# Altium PCB PCB1.1.PcbDoc (part 2 of 2)
Units mm, origin at the board's own origin, x right, y up, seen from the top; angles counter-clockwise.
Board outline 43 x 43 mm, 4 copper layers (Top Layer, Mid-Layer 1, Mid-Layer 2, Bottom Layer); 149 components, 104 nets, 520 pads, 244 vias.
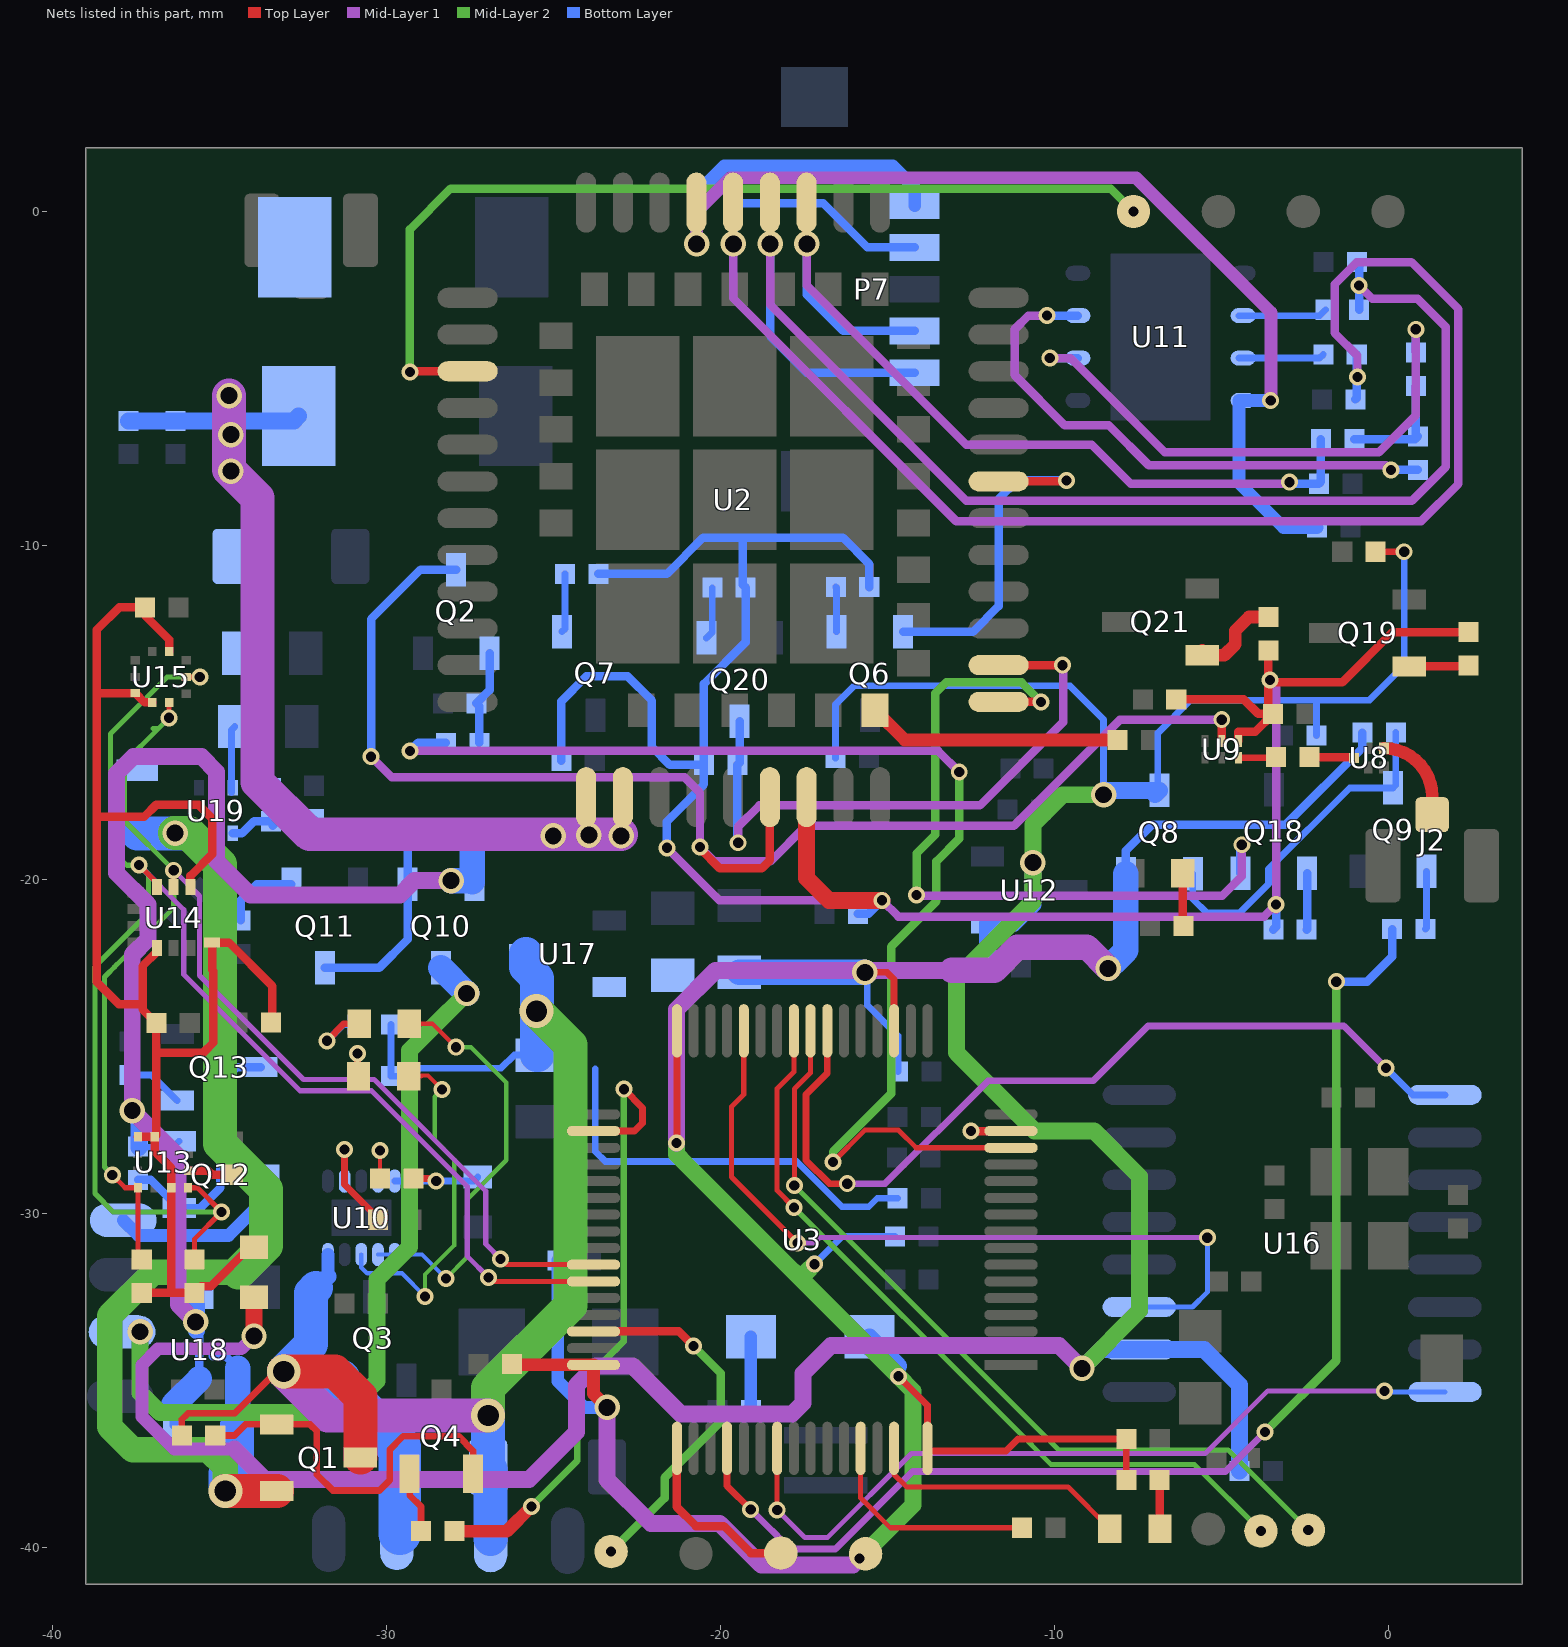
[diagram p4: the nets of this part, all layers, seen from the top]

## Via types
v1: diameter 0.508, hole 0.305, Top Layer to Bottom Layer, tented both sides, 214 vias
v2: diameter 0.762, hole 0.508, Top Layer to Bottom Layer, tented both sides, 23 vias
v3: diameter 1.016, hole 0.635, Top Layer to Bottom Layer, tented both sides, 7 vias

## Nets (pads, with @x,y where several pads share a name; then routed paths per layer and width w, separated by ;. In a path a pad name is that pad's centre, name@x,y a point inside that pad or via, vN(x,y) a via of type N, cw(c..) or ccw(c..) an arc to the next point about the centre after c; other vN are vias at no path point) (continued)
NetC40_1: C40.1 U13.5 | length 1.4
  Top Layer w0.254: U13.5@-35.914,-28.714 -35.325,-28.714 -35.201,-28.838 C40.1@-34.578,-28.838
NetD1_2: D1.2 R7.1 | length 2.2
  Bottom Layer w0.381: R7.1@-19.077,-35.878 D1.2@-19.077,-33.693
NetJ2_1: J2.1 U8.4 | length 2.8
  Top Layer w0.381: U8.4@-0.116,-16.07 cw(c-0.116,-17.507) 1.321,-17.507 J2.1@1.321,-18.058
NetL1_1: L1.1 U9.3 | length 1.1
  Top Layer w0.203: U9.3@-4.478,-16.354 -3.374,-16.354 L1.1@-3.353,-16.332
NetL1_2: L1.2 U8.1 | length 1.3
  Top Layer w0.254: L1.2@-2.353,-16.332 -1.041,-16.332 U8.1@-1.016,-16.358
NetL5_2: L5.2 U18.B1 | length 2.4
  Bottom Layer w0.254: L5.2@-36.357,-36.336 L5.2@-36.357,-35.721 ; -35.587,-34.952 U18.B1@-35.587,-34.277
  Bottom Layer w0.762: L5.2@-36.357,-35.721 -35.587,-34.952
NetL6_1: L6.1 U19.5
NetLED1_2: LED1.2 R9.1 | length 1.6
  Top Layer w0.254: LED1.2@-6.145,-19.812 -6.145,-21.363 R9.1@-6.121,-21.387
NetLED2_1: LED2.1 R29.2 | length 2.3
  Top Layer w0.203: v1(-31.767,-24.827) -31.256,-24.316 LED2.1@-30.802,-24.316
  Bottom Layer w0.203: v1(-31.767,-24.827) -31.277,-24.336 R29.2@-30.85,-24.336
NetLED2_2: LED2.2 U10.6 U10.7 | length 13
  Top Layer w0.127: LED2.2@-29.302,-24.316 -28.61,-24.316 ; -28.332,-24.594 -28.61,-24.316 ; v1(-27.907,-25.019) -28.61,-24.316
  Mid-Layer 2 w0.127: v1(-28.209,-31.94) -27.569,-31.3 -27.569,-29.574 -26.401,-28.406 -26.401,-27.534 -26.401,-27.356 -26.401,-26.073 -27.454,-25.019 v1(-27.907,-25.019)
  Bottom Layer w0.127: U10.7@-30.239,-31.228 U10.6@-29.739,-31.228 -28.921,-31.228 v1(-28.209,-31.94)
NetLED4_1: LED4.1 R12.2 | length 1.4
  Top Layer w0.203: v1(-30.85,-25.204) -30.85,-25.861 LED4.1@-30.825,-25.886
  Bottom Layer w0.203: R12.2@-30.85,-25.886 v1(-30.85,-25.204)
NetLED4_2: LED4.2 U10.8 | length 11.1
  Top Layer w0.127: -28.946,-25.886 LED4.2@-29.325,-25.886 -29.307,-25.868 -28.741,-25.868 v1(-28.322,-26.287)
  Mid-Layer 2 w0.127: v1(-28.833,-32.48) -28.833,-31.828 -27.96,-30.955 -27.96,-28.38 -28.54,-27.8 -28.54,-26.505 v1(-28.322,-26.287)
  Bottom Layer w0.127: U10.8@-30.739,-31.228 -30.739,-31.614 -30.565,-31.789 -29.524,-31.789 v1(-28.833,-32.48)
NetLED5_1: LED5.1 R65.1 | length 1.5
  Top Layer w0.254: R65.1@-6.837,-37.975 -6.828,-37.983 LED5.1@-6.828,-39.433
NetLED5_2: LED5.2 U3.62 | length 7.9
  Top Layer w0.152: U3.62@-14.788,-37.03 -14.788,-37.81 -14.416,-38.183 -9.954,-38.183 -9.579,-38.183 LED5.2@-8.328,-39.433
NetQ1_1: Q1.1 Q4.2 R4.2 | length 11.5
  Top Layer w0.203: R4.2@-35.113,-36.64 -34.538,-36.64 -34.208,-36.31 Q1.1@-33.268,-36.31 -32.277,-36.31 -32.074,-36.513 -32.074,-37.809 -31.592,-38.291 -30.195,-38.291 -29.89,-37.986 -29.89,-37.072 -29.483,-36.666 -27.832,-36.666 -27.39,-37.108 Q4.2@-27.39,-37.791
NetQ2_1: Q2.1 R10.1 R11.1 | length 2.9
  Bottom Layer w0.254: R10.1@-27.207,-15.906 -27.207,-14.808 R11.1@-27.292,-14.723 -26.899,-14.33 Q2.1@-26.899,-13.221
NetQ4_1: Q4.1 R8.1 | length 1.9
  Top Layer w0.203: Q4.1@-29.29,-37.791 -29.29,-38.433 -28.95,-38.774 R8.1@-28.95,-39.51
NetQ6_1: Q6.1 R28.1 | length 1.3
  Bottom Layer w0.203: R28.1@-16.532,-11.242 -16.515,-11.259 Q6.1@-16.515,-12.583
NetQ7_1: Q7.1 R31.1 | length 1.8
  Bottom Layer w0.203: Q7.1@-24.73,-12.577 -24.645,-12.492 R31.1@-24.645,-10.847
NetQ8_1: Q8.1 Q9.3 R33.2 | length 10.3
  Bottom Layer w0.203: Q8.1@-5.846,-19.831 -5.846,-20.58 -5.426,-21 -4.446,-21 -3.579,-20.133 -3.579,-19.688 -1.146,-17.256 Q9.3@0.152,-17.256 ; Q9.3@0.234,-17.174 R33.2@0.234,-15.598
NetQ9_1: Q9.1 R34.1 | length 1.7
  Bottom Layer w0.203: R34.1@1.12,-21.483 1.152,-21.451 Q9.1@1.152,-19.756
NetQ10_1: Q10.1 Q11.3 R36.2 | length 6.7
  Bottom Layer w0.254: Q11.3@-31.833,-22.64 -30.204,-22.64 -29.356,-21.792 Q10.1@-29.356,-20.14 -29.356,-19.115 -28.817,-18.576 R36.2@-28.425,-18.576
NetQ11_1: Q11.1 R37.1 | length 2.4
  Bottom Layer w0.254: R37.1@-34.352,-21.225 -34.352,-20.625 -33.868,-20.14 Q11.1@-32.909,-20.14 ; Q11.1@-32.909,-20.14 -32.871,-20.179 Q11.1@-32.833,-20.14 Q11.1@-32.909,-20.14
NetQ12_1: Q12.1 Q13.3 R50.2 | length 7.6
  Bottom Layer w0.254: R50.2@-37.421,-28.99 -37.039,-28.99 Q12.1@-36.195,-29.834 -35.563,-29.834 -34.956,-29.228 -34.956,-26.095 -34.478,-25.618 Q13.3@-33.753,-25.618
NetQ13_1: Q13.1 R51.1 | length 1.7
  Bottom Layer w0.203: R51.1@-37.672,-25.848 -37.023,-25.848 Q13.1@-36.253,-26.618
NetQ18_1: Q18.1 R40.1 | length 1.7
  Bottom Layer w0.254: R40.1@-2.436,-21.5 -2.42,-21.484 Q18.1@-2.42,-19.807
NetQ19_1: Q19.1 R41.1 | length 1.8
  Top Layer w0.254: Q19.1@0.635,-13.614 2.388,-13.614 R41.1@2.413,-13.589
NetQ20_1: Q20.1 R44.1 | length 1.6
  Bottom Layer w0.203: Q20.1@-20.411,-12.766 -20.232,-12.587 R44.1@-20.232,-11.261
NetQ21_1: Q21.1 R45.1 | length 2.8
  Top Layer w0.381: Q21.1@-5.563,-13.132 Q21.1@-5.563,-13.284 -4.902,-13.284 -4.572,-12.954 -4.572,-12.649 -4.572,-12.548 -4.166,-12.141 R45.1@-3.581,-12.141
NetR3_1: R3.1 U3.60 | length 6.7
  Top Layer w0.152: U3.60@-15.788,-37.03 -15.788,-38.518 -14.901,-39.406 R3.1@-10.962,-39.406
NetR13_1: R13.1 U10.2 | length 3.5
  Top Layer w0.203: v1(-31.239,-28.081) -31.239,-29.128 -30.241,-30.126 R13.1@-30.241,-30.185
  Bottom Layer w0.203: U10.2@-31.239,-29.028 v1(-31.239,-28.081)
NetR14_1: R14.1 R15.2 U10.5 | length 3.3
  Top Layer w0.203: R14.1@-29.184,-28.953 -28.572,-28.953 v1(-28.498,-29.028)
  Bottom Layer w0.203: U10.5@-29.739,-29.028 v1(-28.498,-29.028) -27.376,-29.028 R15.2@-27.252,-28.903
NetR14_2: R14.2 U10.4 | length 1.8
  Top Layer w0.127: R14.2@-30.184,-28.953 v1(-30.184,-28.115)
  Bottom Layer w0.127: U10.4@-30.239,-29.028 -30.184,-28.972 v1(-30.184,-28.115)
NetR19_2: R19.2 R20.2 U19.1 | length 2.7
  Bottom Layer w0.254: U19.1@-34.588,-18.615 -34.312,-18.615 -33.951,-18.254 R19.2@-33.449,-18.254 -33.386,-18.191 R20.2@-32.16,-18.191 ; R19.2@-33.395,-18.391 R19.2@-33.325,-18.321
NetR23_2: R23.2 U11.7 | length 2.6
  Bottom Layer w0.203: U11.7@-4.464,-4.387 U11.7@-4.337,-4.387 ; U11.7@-4.337,-4.387 -3.48,-4.387 ; -3.48,-4.387 -2.05,-4.387 R23.2@-1.937,-4.274
NetR25_1: R25.1 U11.3 | length 16.7
  Mid-Layer 1 w0.254: v1(-10.215,-3.117) -10.77,-3.117 -11.176,-3.523 -11.176,-4.902 -9.677,-6.401 -8.357,-6.401 -7.163,-7.595 -0.055,-7.595 v1(0.084,-7.734) ; v1@0.061,-7.757 v1@0.076,-7.772
  Bottom Layer w0.254: v1(-10.215,-3.117) U11.3@-9.287,-3.117 ; v1(0.084,-7.734) R25.1@0.891,-7.734
NetR25_2: R25.2 R26.2 R27.2 | length 3.5
  Bottom Layer w0.254: R27.2@-1.01,-6.818 0.807,-6.818 R25.2@0.891,-6.734 0.83,-6.674 R26.2@0.83,-5.219
NetR26_1: R26.1 U11.2 | length 16.7
  Mid-Layer 1 w0.254: v1(-10.128,-4.387) -9.507,-4.387 -6.68,-7.214 -0.279,-7.214 0.83,-6.104 v1(0.83,-3.526)
  Bottom Layer w0.254: v1(-10.128,-4.387) U11.2@-9.287,-4.387 ; R26.1@0.83,-4.219 v1(0.83,-3.526)
NetR39_2: R39.2 U11.6 | length 2.7
  Bottom Layer w0.203: U11.6@-4.464,-3.117 U11.6@-4.337,-3.117 ; U11.6@-4.337,-3.117 -3.15,-3.117 ; -3.15,-3.117 -2.044,-3.117 R39.2@-1.868,-2.941
POWER_CTRL_GPS: R34.2 U3.52 | length 37.1
  Top Layer w0.203: U3.52@-19.788,-37.03 -19.788,-38.15 v1(-19.081,-38.858)
  Mid-Layer 1 w0.203: v1(-19.081,-38.858) -18.114,-39.825 ; -18.432,-39.507 -18.114,-39.825 ; v1(-3.686,-36.543) -4.865,-37.722 -14.231,-37.722 -16.549,-40.039 -17.899,-40.039 -18.114,-39.825
  Mid-Layer 2 w0.254: v1(-3.686,-36.543) -1.549,-34.406 v1(-1.549,-23.057)
  Bottom Layer w0.254: v1(-1.549,-23.057) -0.627,-23.057 0.12,-22.31 R34.2@0.12,-21.483
POWER_VBAT: R8.2 U3.34 | length 19.1
  Top Layer w0.203: U3.34@-23.788,-27.53 -22.558,-27.53 -22.321,-27.293 -22.321,-26.836 v1(-22.879,-26.277)
  Top Layer w0.381: R8.2@-27.95,-39.51 -26.385,-39.51 v1(-25.648,-38.774)
  Mid-Layer 2 w0.203: v1(-25.648,-38.774) -24.276,-37.402 -24.276,-35.218 -22.879,-33.821 -22.879,-27.826 v1(-22.879,-26.277)
PWRKEY: Q2.3 U2.39 U9.5 | length 41.8
  Top Layer w0.254: v1(-20.599,-19.025) -20.599,-19.075 -20.015,-19.66 -18.745,-19.66 -18.509,-19.423 U2.39@-18.509,-17.531 ; U9.5@-4.978,-15.854 v1(-4.978,-15.215)
  Mid-Layer 1 w0.254: v1(-30.445,-16.321) -29.824,-16.942 -21.057,-16.942 -20.599,-17.399 v1(-20.599,-19.025) -20.168,-19.456 -18.491,-19.456 -17.424,-18.39 -11.201,-18.39 -8.026,-15.215 v1(-4.978,-15.215)
  Bottom Layer w0.254: v1(-30.445,-16.321) -30.445,-12.2 -28.966,-10.721 Q2.3@-27.899,-10.721
RF_IN: C20.1 U2.68 | length 7.6
  Top Layer w0.381: U2.68@-15.359,-14.931 -14.466,-15.824 C20.1@-8.103,-15.824
RI: Q6.2 U2.7 | length 10.7
  Top Layer w0.254: U2.7@-11.659,-8.081 -9.656,-8.081 v1(-9.627,-8.052)
  Bottom Layer w0.254: Q6.2@-14.515,-12.583 -12.431,-12.583 -11.659,-11.811 -11.659,-8.611 -11.1,-8.052 v1(-9.627,-8.052)
RXD3: T18.1 U3.25 | length 23.7
  Top Layer w0.152: U3.25@-17.788,-24.53 -17.788,-25.754 -18.295,-26.261 -18.295,-29.305 v1(-17.782,-29.818)
  Mid-Layer 2 w0.152: v1(-17.782,-29.818) -11.207,-36.394 -10.083,-37.517 -5.793,-37.517 v1(-3.806,-39.504)
SCL: R22.2 U3.42 U13.1 U14.13 U15.2 | length 39.9
  Top Layer w0.152: v1(-38.194,-28.842) -37.81,-29.226 U13.1@-37.427,-29.226 -37.427,-31.263 R22.2@-37.313,-31.377 ; v1(-36.494,-15.156) U15.2@-36.494,-14.696 ; U14.13@-36.356,-20.228 v1(-36.356,-19.724) ; v1(-26.569,-31.357) -26.395,-31.53 U3.42@-23.788,-31.53
  Mid-Layer 1 w0.152: v1(-36.356,-19.724) -35.588,-20.492 -35.588,-22.875 -32.473,-25.99 -30.355,-25.99 -27.014,-29.331 -27.014,-30.912 v1(-26.569,-31.357)
  Mid-Layer 2 w0.152: v1(-38.194,-28.842) -38.429,-28.607 -38.429,-22.915 -38.065,-22.55 ; -38.147,-22.633 -38.065,-22.55 ; -36.972,-15.483 -36.821,-15.483 ; v1(-36.494,-15.156) -36.821,-15.483 ; -38.065,-22.55 -36.356,-20.842 v1(-36.356,-19.724) -37.831,-18.249 -37.831,-16.493 -36.821,-15.483
SCLK: U3.55 U16.16 | length 24
  Top Layer w0.152: v1(-18.288,-38.873) U3.55@-18.288,-37.03
  Mid-Layer 1 w0.152: v1(-18.288,-38.873) -17.459,-39.703 -16.786,-39.703 -14.267,-37.183 -5.474,-37.183 -3.599,-35.308 v1(-0.102,-35.308)
  Bottom Layer w0.152: v1(-0.102,-35.308) -0.073,-35.337 U16.16@1.702,-35.337
SDA: R24.1 U3.43 U13.4 U14.14 U15.4 | length 48
  Top Layer w0.152: v1(-37.399,-19.561) -36.856,-20.103 U14.14@-36.856,-20.228 ; U15.4@-35.982,-13.934 v1(-35.576,-13.934) ; U13.4@-35.927,-29.226 -35.647,-29.226 v1(-34.923,-29.95) -35.738,-30.765 R24.1@-35.738,-31.377 ; v1(-26.928,-31.915) -26.813,-32.03 U3.43@-23.788,-32.03
  Mid-Layer 1 w0.152: v1(-37.399,-19.561) -36.056,-20.904 -36.056,-22.839 -32.573,-26.323 -30.432,-26.323 -27.568,-29.187 -27.568,-31.275 v1(-26.928,-31.915)
  Mid-Layer 2 w0.152: v1@-37.399,-19.573 -37.76,-19.573 -38.255,-19.078 -38.255,-15.639 -36.549,-13.934 v1(-35.576,-13.934) ; v1(-37.399,-19.561) -37.112,-19.848 -37.112,-21.002 -38.716,-22.606 -38.716,-29.401 -38.166,-29.95 v1(-34.923,-29.95)
SIM_CLK: C17.2 P7.1 R39.1 U2.16 | length 41.2
  Mid-Layer 1 w0.254: v2(-18.499,-0.965) -18.499,-2.786 -12.624,-8.661 0.711,-8.661 1.727,-7.645 1.727,-3.454 0.889,-2.616 -0.47,-2.616 v1(-0.868,-2.218)
  Bottom Layer w0.254: v2(-18.499,-0.965) -18.499,-3.726 -17.399,-4.826 P7.1@-14.173,-4.826 ; C17.2@-0.932,-1.513 -0.868,-1.577 v1(-0.868,-2.218) R39.1@-0.868,-2.941
SIM_DATA: C18.2 P7.2 R27.1 U2.15 | length 26.9
  Top Layer w0.254: U2.15@-17.409,0.269 -17.409,-0.956 v2(-17.399,-0.965)
  Mid-Layer 1 w0.254: v2(-17.399,-0.965) -17.399,-2.21 -12.624,-6.985 -8.865,-6.985 -7.696,-8.153 -2.997,-8.153 v1(-2.946,-8.103)
  Bottom Layer w0.254: v2(-17.399,-0.965) -17.399,-2.489 -16.312,-3.576 P7.2@-14.173,-3.576 ; v1(-2.946,-8.103) -2.9,-8.149 C18.2@-2.067,-8.149 -2.01,-8.092 R27.1@-2.01,-6.818
SIM_PWR: R10.2 U3.14 | length 37.1
  Top Layer w0.152: v1(-16.616,-28.455) -15.664,-27.503 -14.655,-27.503 -14.128,-28.03 U3.14@-11.349,-28.03 ; U3.14@-11.349,-28.091 U3.14@-11.288,-28.03
  Mid-Layer 1 w0.254: v1(-29.278,-16.148) -13.47,-16.148 v1(-12.838,-16.78)
  Mid-Layer 2 w0.254: v1(-16.616,-28.455) -16.616,-28.149 -14.874,-26.408 -14.874,-22.006 -13.519,-20.651 -13.519,-19.457 -12.838,-18.776 v1(-12.838,-16.78)
  Bottom Layer w0.254: v1(-29.278,-16.148) -29.036,-15.906 R10.2@-28.207,-15.906
SIM_RST: C16.2 P7.4 R23.1 U2.17 | length 47.8
  Mid-Layer 1 w0.254: v2(-19.599,-0.965) -19.599,-2.601 -12.929,-9.271 0.991,-9.271 2.108,-8.153 2.108,-2.921 0.7,-1.513 -0.932,-1.513 -1.6,-2.181 -1.6,-3.632 -0.914,-4.318 v1(-0.914,-4.953)
  Bottom Layer w0.254: v2(-19.599,-0.965) -19.599,0.01 -19.355,0.254 -16.916,0.254 -15.586,-1.076 P7.4@-14.173,-1.076 ; C16.2@-0.975,-5.625 -0.937,-5.587 R23.1@-0.937,-4.274
SIM_RST1: U3.15 | length 1.2
  Top Layer w0.254: v1(-12.487,-27.53) U3.15@-11.288,-27.53
SIM_RXD: Q20.3 R46.1 U2.2 | length 19.4
  Top Layer w0.254: U2.2@-11.659,-13.581 v1(-9.746,-13.581) v1@-9.728,-13.564
  Mid-Layer 1 w0.254: v1(-19.456,-18.898) -19.456,-18.415 -18.821,-17.78 -12.217,-17.78 -9.728,-15.291 ; -9.728,-14.732 -9.728,-15.291 ; v1@-9.728,-13.564 -9.728,-15.291
  Bottom Layer w0.254: v1(-19.456,-18.898) -19.481,-18.873 R46.1@-19.481,-16.57 -19.411,-16.5 Q20.3@-19.411,-15.266
SIM_TXD: Q18.2 U2.1 | length 22.8
  Top Layer w0.254: U2.1@-11.659,-14.681 v1(-10.389,-14.681)
  Mid-Layer 1 w0.254: v1(-14.116,-20.46) -14.089,-20.488 -11.754,-20.488 -4.968,-20.488 -4.378,-19.897 v1(-4.378,-18.958)
  Mid-Layer 2 w0.254: v1(-14.116,-20.46) -14.116,-19.216 -13.562,-18.661 -13.562,-14.425 -13.233,-14.097 -10.973,-14.097 v1(-10.389,-14.681)
  Bottom Layer w0.254: Q18.2@-4.42,-19.807 v1@-4.42,-19
SIM_VDD: C14.2 P7.5 U2.18 U11.8 | length 38.4
  Mid-Layer 1 w0.381: v2(-20.699,-0.965) -20.699,0.002 -19.688,1.013 -7.541,1.013 -3.505,-3.023 v1@-3.505,-5.657
  Bottom Layer w0.381: v2(-20.699,-0.965) -20.699,0.535 -19.863,1.372 -14.834,1.372 -14.173,0.711 P7.5@-14.173,0.174 ; v1(-3.512,-5.657) -4.464,-5.657 -4.464,-8.126 -3.129,-9.461 C14.2@-2.128,-9.461
SPI_RESET: U3.28 U16.3 | length 23.5
  Top Layer w0.152: U3.28@-19.288,-24.53 -19.288,-26.435 -19.655,-26.802 -19.655,-28.902 v1(-17.678,-30.88)
  Mid-Layer 1 w0.152: v1(-17.678,-30.88) -17.173,-30.88 -17.016,-30.723 v1(-5.41,-30.723)
  Bottom Layer w0.152: U16.3@-7.448,-32.797 -5.854,-32.797 -5.41,-32.353 v1(-5.41,-30.723)
SWCLK: T10.1 U3.49 | length 5.4
  Top Layer w0.254: U3.49@-21.288,-37.03 -21.301,-37.043 -21.301,-38.777 -20.72,-39.358 -19.882,-39.358 -19.075,-40.165 T10.1@-18.18,-40.165
SWD: T9.1 U3.46 | length 11
  Top Layer w0.254: U3.46@-23.788,-33.53 -21.232,-33.53 v1(-20.794,-33.968)
  Mid-Layer 2 w0.254: v1(-23.26,-40.12) -21.66,-38.52 -21.66,-37.91 -19.984,-36.234 -19.984,-34.778 v1(-20.794,-33.968)
TXD3: T11.1 U3.24 | length 24.5
  Top Layer w0.152: v1(-17.775,-29.16) -17.775,-26.274 -17.288,-25.787 U3.24@-17.288,-24.53
  Mid-Layer 2 w0.152: v1(-17.775,-29.16) -9.859,-37.077 -4.849,-37.077 -4.786,-37.077 v1(-2.387,-39.475)
VBAT: C44.1 D4.2 Q1.3 R2.1 R4.1 R12.1 R29.1 T17.1 U10.10 U17.3 | length 58.5
  Top Layer w0.203: R4.1@-36.113,-36.64 -36.113,-36.158 -35.935,-35.98 -34.538,-35.98 -33.283,-34.725 v3(-33.062,-34.725)
  Top Layer w1.016: v3(-33.062,-34.725) -31.526,-34.725 -30.768,-35.483 Q1.3@-30.768,-37.31
  Mid-Layer 1 w1.016: v3(-33.062,-34.725) -31.744,-36.042 v3(-26.942,-36.042)
  Mid-Layer 2 w1.016: v3(-26.942,-36.042) -26.942,-35.216 -24.48,-32.754 -24.48,-24.956 v3(-25.496,-23.94)
  Bottom Layer w0.203: R29.1@-29.85,-24.336 R12.1@-29.85,-25.886 -29.359,-25.886 -29.12,-25.647 -26.551,-25.647 -26.16,-25.256 C44.1@-25.469,-25.256 ; -23.736,-25.671 -23.736,-28.138 -23.434,-28.44 -17.703,-28.44 -16.346,-29.796 -15.548,-29.796 -15.293,-29.541 R2.1@-14.69,-29.541
  Bottom Layer w0.381: -31.739,-31.881 U10.10@-31.739,-31.228
  Bottom Layer w0.508: -32.25,-32.392 -31.739,-31.881
  Bottom Layer w1.016: v3(-33.062,-34.725) -32.25,-33.912 -32.25,-32.392 -32.25,-32.376 -32.094,-32.221 ; v3(-26.942,-36.042) D4.2@-26.942,-37.584 -26.869,-37.656 T17.1@-26.869,-39.742 ; U17.3@-25.811,-22.222 -25.811,-22.623 -25.474,-22.96 -25.474,-24.112 -25.474,-25.25 C44.1@-25.469,-25.256
VBAT2: L5.1 L6.2 Q1.2 U18.A1 U19.3 | length 35
  Top Layer w1.016: v3(-34.811,-38.31) Q1.2@-33.268,-38.31
  Mid-Layer 2 w0.762: v3(-34.811,-38.31) -34.811,-37.587 -35.325,-37.072 -37.586,-37.072 -38.272,-36.386 -38.272,-33.059 -36.976,-31.763 -34.411,-31.763
  Mid-Layer 2 w1.016: v2(-36.311,-18.612) -35.904,-18.612 -34.97,-19.546 -34.97,-27.903 -33.598,-29.274 -33.598,-30.951 -34.411,-31.763
  Bottom Layer w0.254: U18.A1@-35.187,-34.277 -34.793,-34.277 -34.436,-34.634
  Bottom Layer w0.762: L5.1@-34.457,-36.336 -34.436,-36.315 -34.436,-34.634
  Bottom Layer w1.016: L6.2@-37.445,-18.625 -36.324,-18.625 v2@-36.315,-18.615 ; v2(-36.311,-18.612) v2@-36.315,-18.615 ; v2@-35.96,-18.615 v2@-36.315,-18.615 ; v3(-34.811,-38.31) -34.811,-37.777 -34.457,-37.423 L5.1@-34.457,-36.336
VBAT_OUT: C24.2 C29.1 C31.1 C43.2 C47.1 C48.1 D3.2 R19.1 U2.34 U2.35 U19.6 | length 30.6
  Mid-Layer 1 w1.016: v2(-34.696,-5.512) -34.696,-7.722 -33.845,-8.572 -33.845,-17.081 -32.283,-18.644 v2@-22.962,-18.644
  Bottom Layer w0.203: U19.6@-34.628,-17.391 -34.628,-15.518 C47.1@-34.527,-15.418
  Bottom Layer w0.508: C43.2@-37.706,-6.265 C24.2@-36.309,-6.265 -32.758,-6.265 C29.1@-32.618,-6.125
  other v2: -24.994,-18.694 -22.962,-18.694 -23.927,-18.669 -34.646,-7.772 -34.646,-6.68
VBUS: T1.1 U2.24 | length 28.5
  Top Layer w0.254: v1(-29.286,-4.801) -29.267,-4.781 U2.24@-27.559,-4.781
  Mid-Layer 2 w0.254: v1(-29.286,-4.801) -29.286,-0.533 -28.067,0.686 -8.306,0.686 v1(-7.62,0)
VCC_3.3V_S: C11.2 C37.1 FB2.1 Q8.3 R30.2 R42.2 R43.2 U12.1 U16.2 | length 105.3
  Top Layer w0.203: R43.2@-0.372,-10.185 v1(0.483,-10.185)
  Top Layer w0.508: v2(-33.952,-33.67) FB2.1@-33.952,-32.503
  Mid-Layer 1 w0.381: -34.538,-37.047 -36.341,-37.047 -37.307,-36.081 -37.307,-34.532 -36.824,-34.049 -34.331,-34.049 v2(-33.952,-33.67)
  Mid-Layer 1 w0.508: -34.538,-37.047 -33.624,-37.961 -25.724,-37.961 -24.302,-36.539 -24.302,-35.142 -23.718,-34.557 -22.625,-34.557 -21.178,-36.005 -17.85,-36.005 -17.52,-35.675 -17.52,-34.786 -16.682,-33.948 -9.849,-33.948 v2(-9.163,-34.634)
  Mid-Layer 2 w0.508: v2(-9.163,-34.634) -7.436,-32.906 -7.436,-28.893 -8.808,-27.522 -10.586,-27.522 -12.923,-25.185 -12.923,-22.95 -10.637,-20.664 v2(-10.637,-19.495) -10.637,-18.352 -9.746,-17.461 v2(-8.517,-17.461)
  Bottom Layer w0.203: R30.2@-16.543,-16.365 -16.543,-14.759 -15.983,-14.199 -9.525,-14.199 -8.517,-15.207 v2(-8.517,-17.461) ; Q8.3@-6.846,-17.331 -6.893,-17.284 -6.893,-15.606 -5.918,-14.63 -2.184,-14.63 ; R42.2@-2.138,-15.686 -2.138,-14.677 -2.184,-14.63 ; v1(0.483,-10.185) 0.483,-13.589 -0.559,-14.63 -2.184,-14.63
  Bottom Layer w0.508: C37.1@-11.993,-22.635 U12.1@-11.993,-21.314 -11.211,-21.314 -10.637,-20.74 v2(-10.637,-19.495) ; v2(-9.163,-34.634) -8.597,-34.067 U16.2@-7.448,-34.067 -5.513,-34.067 -4.445,-35.135 C11.2@-4.445,-37.711 ; v2@-8.387,-17.331 Q8.3@-6.846,-17.331 Q8.3@-6.977,-17.461
VCC_3V: C12.2 C13.2 C15.2 C28.1 C34.1 C50.2 D1.1 Q8.2 R6.1 R33.1 R65.2 T19.1 U3.19 U3.32 U3.48 U3.64 U17.2 | length 94
  Top Layer w0.203: v1@-21.288,-27.875 U3.32@-21.288,-24.53 ; v2(-15.666,-22.776) -15.001,-22.776 -14.788,-22.989 U3.19@-14.788,-24.53 ; v1(-14.657,-34.872) -13.788,-35.741 U3.64@-13.788,-37.03 ; U3.64@-13.749,-37.07 -13.788,-37.109 -11.441,-37.109 -11.081,-36.749 C12.2@-7.835,-36.749 R65.2@-7.837,-37.975 R65.2@-7.837,-37.975
  Top Layer w0.381: C13.2@-26.229,-34.53 U3.48@-23.788,-34.53 -23.788,-35.395 v2(-23.38,-35.804)
  Mid-Layer 1 w0.508: v2(-23.38,-35.804) -23.38,-37.968 -22.067,-39.282 -20.009,-39.282 -18.765,-40.526 -16.024,-40.526 v1(-15.825,-40.327) ; v1(-21.304,-27.89) -21.304,-23.891 -20.13,-22.717 -13.064,-22.717
  Mid-Layer 1 w0.762: -13.064,-22.717 -11.789,-22.717 -11.095,-22.022 -9.017,-22.022 v2(-8.382,-22.657)
  Mid-Layer 2 w0.508: v1(-21.304,-27.89) -21.304,-28.226 -21.003,-28.526 v1(-14.657,-34.872) -14.22,-35.309 -14.22,-38.722 v1(-15.825,-40.327) ; -17.402,-31.741 v1(-17.176,-31.515)
  Bottom Layer w0.203: v1(-17.176,-31.515) -16.344,-30.684 R6.1@-14.761,-30.684 ; v2@-15.59,-22.776 -15.59,-23.762 -14.675,-24.677 C15.2@-14.675,-25.749
  Bottom Layer w0.254: Q8.2@-7.846,-19.831 -7.846,-19.133 -7.071,-18.357 -3.066,-18.357 -0.766,-16.058 R33.1@-0.766,-15.598
  Bottom Layer w0.381: C50.2@-24.86,-31.4 -24.86,-35.01 -24.066,-35.804 v2(-23.38,-35.804)
  Bottom Layer w0.508: D1.1@-15.521,-34.008 D1.1@-15.521,-33.693 -14.657,-34.558
  Bottom Layer w0.762: C28.1@-19.428,-22.776 v2(-15.666,-22.776) ; v2@-8.22,-22.495 -7.846,-22.121 Q8.2@-7.846,-19.831
VCC_3V_SENSOR: C35.2 C38.2 C41.2 FB2.2 R22.1 R24.2 U13.3 U13.9 U13.10 U14.5 U14.8 U14.12 U15.1 U15.6 U15.10 | length 47.5
  Top Layer w0.254: U13.10@-37.427,-27.701 U13.9@-36.927,-27.701 ; R22.1@-37.313,-32.377 -36.412,-32.377 ; U15.1@-36.994,-14.696 -37.227,-14.696 U15.10@-37.507,-14.416 -38.635,-14.416 -38.653,-14.398 ; C41.2@-36.891,-24.285 -37.289,-23.886 -37.289,-23.732 ; -36.876,-24.634 -36.876,-25.189 ; U14.5@-36.856,-22.048 -36.856,-22.159 -37.289,-22.592 -37.289,-23.732 ; U15.6@-36.494,-13.171 -36.494,-12.813 -37.211,-12.096 C35.2@-37.211,-11.851 -37.989,-11.851 -38.653,-12.515 -38.653,-14.398 ; U14.12@-35.856,-20.228 -35.856,-19.889 -35.208,-19.241 -35.208,-18.164 -35.614,-17.758 -36.877,-17.758 -37.232,-18.113 -38.618,-18.113 -38.653,-18.148 ; R24.2@-35.638,-32.377 R24.2@-35.738,-32.377 ; R24.2@-35.638,-32.277 R24.2@-35.738,-32.377 ; FB2.2@-33.952,-31.003 -34.073,-31.003 -35.244,-32.175 -35.536,-32.175 R24.2@-35.738,-32.377 ; C38.2@-33.445,-24.286 -33.406,-24.246 -33.406,-23.188 ; -33.406,-23.718 -33.406,-23.188 ; -38.653,-18.148 -38.653,-14.398 ; -38.653,-18.148 -38.653,-23.076 -37.998,-23.732 -37.289,-23.732 ; U13.9@-36.927,-27.701 -36.927,-28.142 -36.427,-28.642 U13.3@-36.427,-29.226 -36.427,-32.363 -36.412,-32.377 ; U13.9@-36.927,-27.701 -36.876,-27.65 -36.876,-25.189 ; -36.876,-25.189 -36.119,-25.189 -36.116,-25.186 -35.471,-25.186 -35.166,-24.881 -35.166,-22.735 -35.206,-22.694 U14.8@-35.206,-21.888 -34.705,-21.888 -33.406,-23.188 ; -36.412,-32.377 R24.2@-35.738,-32.377
VCC_5V: C46.1 Q10.2 Q12.2 R36.1 R50.1 U18.B2 | length 37.7
  Mid-Layer 1 w0.508: v2(-35.702,-33.245) -36.22,-32.726 -36.22,-28.299 v2(-37.598,-26.921) -37.598,-22.25 -37.129,-21.781 -37.129,-20.74 -38.069,-19.8 -38.069,-19.292 -38.069,-18.987 -38.069,-16.828 -37.561,-16.32 -35.529,-16.32 -35.071,-16.777 -35.071,-19.444 -35.01,-19.506 -34.055,-20.46 -29.585,-20.46 -29.155,-20.03 v2(-28.048,-20.03)
  Bottom Layer w0.203: R50.1@-37.394,-27.99 R50.1@-37.421,-27.99 ; R50.1@-37.265,-27.834 -37.394,-27.963 R50.1@-37.421,-27.99 ; Q12.2@-36.195,-27.834 -36.377,-28.017 -37.394,-28.017 R50.1@-37.421,-27.99
  Bottom Layer w0.254: v2@-35.672,-33.507 -35.587,-33.591 U18.B2@-35.587,-33.877
  Bottom Layer w0.508: R50.1@-37.394,-28.017 -37.394,-27.99 -37.394,-27.963 v2@-37.394,-27.125 ; v2@-35.672,-33.507 C46.1@-35.672,-32.206
  Bottom Layer w0.762: v2(-28.048,-20.03) Q10.2@-27.466,-20.03 ; Q10.2@-27.425,-20.071 R36.1@-27.425,-18.576
VCC_5V1: Q10.3 T4.1 | length 23.4
  Mid-Layer 2 w0.508: v2(-37.362,-33.538) -37.362,-35.366 -36.773,-35.954 -31.211,-35.954 -30.271,-35.015 -30.271,-31.97 -29.298,-30.998 -29.298,-25.116 -28.605,-24.423 v2(-27.589,-23.407)
  Bottom Layer w0.762: Q10.3@-28.356,-22.64 v2(-27.589,-23.407)
VCC_5V2: Q12.3 T5.1 | length 5.6
  Bottom Layer w0.381: T5.1@-37.87,-30.2 -37.411,-30.659 -35.728,-30.659 -35.519,-30.659 -34.713,-30.659 -33.695,-29.64 Q12.3@-33.695,-28.834
VCC_IN: Q3.2 T15.1 | length 5.4
  Bottom Layer w1.27: Q3.2@-31.382,-34.989 -31.382,-35.188 -29.677,-36.893 ; -29.677,-36.98 -29.677,-36.893 ; T15.1@-29.59,-39.589 -29.59,-36.98 -29.677,-36.893
VDD_EXT: C19.2 C33.2 R28.2 R31.2 R32.2 R40.2 R41.2 R44.2 R45.2 R46.2 R47.2 U2.40 U9.4 | length 74.7
  Top Layer w0.254: R47.2@-6.341,-14.605 -4.318,-14.605 -3.886,-15.037 C19.2@-3.438,-15.037 ; U9.4@-4.478,-15.854 -4.478,-15.57 -3.972,-15.57 C19.2@-3.438,-15.037 ; -3.581,-14.58 v1@-3.581,-14.097 ; R45.2@-3.581,-13.141 v1@-3.581,-14.097 ; R41.2@2.454,-12.548 R41.2@2.413,-12.589 0.136,-12.589 -1.372,-14.097 v1@-3.581,-14.097 ; v1@-3.581,-14.097 -3.581,-14.894 C19.2@-3.438,-15.037
  Top Layer w0.508: U2.40@-17.409,-17.531 -17.409,-19.955 -16.741,-20.622 v1(-15.147,-20.622)
  Mid-Layer 1 w0.254: v1(-21.59,-19.05) -20.018,-20.622 v1(-15.147,-20.622) -14.662,-21.107 -3.709,-21.107 v1(-3.35,-20.749) ; v1(-3.531,-14.021) -3.35,-14.201 v1(-3.35,-20.749) ; v1@-3.35,-20.903 v1(-3.35,-20.749)
  Bottom Layer w0.254: R32.2@-24.751,-16.447 -24.751,-14.663 -24.008,-13.92 -22.764,-13.92 -22.04,-14.644 -22.04,-16.034 -21.505,-16.57 R46.2@-20.481,-16.57 ; R31.2@-23.645,-10.847 -21.589,-10.847 -20.505,-9.763 -19.314,-9.763 ; v1(-21.59,-19.05) -21.59,-18.263 -20.481,-17.153 R46.2@-20.481,-16.57 ; C33.2@-15.872,-21.025 -15.55,-21.025 v1(-15.147,-20.622) ; R28.2@-15.532,-11.242 -15.532,-10.554 -16.323,-9.763 -19.314,-9.763 ; R40.2@-3.436,-21.5 -3.35,-21.415 v1(-3.35,-20.749) ; R46.2@-20.481,-16.57 -20.481,-14.14 -19.232,-12.891 R44.2@-19.232,-11.261 -19.314,-11.178 -19.314,-9.763
WP: U3.23 U16.9 | length 26.4
  Top Layer w0.203: U3.23@-16.788,-24.53 -16.788,-25.792 -17.428,-26.431 -17.428,-28.405 -16.727,-29.105 v1(-16.191,-29.105)
  Mid-Layer 1 w0.203: v1(-16.191,-29.105) -15.057,-29.105 -11.978,-26.027 -8.835,-26.027 -7.19,-24.382 -1.324,-24.382 v1(-0.064,-25.642)
  Bottom Layer w0.203: v1(-0.064,-25.642) 0.741,-26.447 U16.9@1.702,-26.447
pads on no net: P7. P7.0 U2.3 U2.4 U2.5 U2.9 U2.10 U2.11 U2.12 U2.14 U2.20 U2.22 U2.23 U2.28 U2.29 U2.38 U2.42 U2.43 U2.44 U2.46 U2.47 U2.48 U2.49 U2.50 U2.51 U2.52 U2.53 U2.54 U2.55 U2.56 U2.57 U2.58 U2.59 U2.60 U2.64 U2.65 U3.2 U3.9 U3.10 U3.11 U3.20 U3.26 U3.27 U3.29 U3.30 U3.33 U3.38 U3.39 U3.40 U3.41 U3.51 U3.53 U3.54 U3.56 U3.61 U10.9 U11.4 U11.5 U13.2 U13.7 U13.11 U13.12 U14.4 U14.9 U14.10 U14.11 U15.7 U16.1 U16.4 U16.5 U16.6 U16.11 U16.12 U16.13 U16.14 Y1.3

## Polygon pours and split planes (outlines as drawn)
AGND on Top Layer "Mid-Layer 1-No Net" (solid, remove dead copper, pour order 1000): -42.795,4.945 -42.553,5.187 9.97,5.187 9.97,-38.285 6.495,-41.76 4.556,-43.699 -31.967,-43.699 -41.906,-43.699 -44.007,-41.598 -42.149,-39.74 -42.149,5.268
AGND on Mid-Layer 1 "Mid-Layer 1-No Net" (solid, remove dead copper, pour order 1001): -44.087,4.652 -43.845,4.894 8.678,4.894 8.678,-38.578 5.203,-42.053 3.264,-43.992 -33.259,-43.992 -43.198,-43.992 -45.299,-41.891 -43.441,-40.033 -43.441,4.975
AGND on Mid-Layer 2 "Mid-Layer 1-No Net" (solid, remove dead copper, pour order 1002): -44.843,4.769 -44.601,5.011 7.922,5.011 7.922,-38.461 4.447,-41.936 2.508,-43.875 -34.015,-43.875 -43.954,-43.875 -46.055,-41.774 -44.197,-39.916 -44.197,5.092
AGND on Bottom Layer "Mid-Layer 1-No Net" (solid, remove dead copper, pour order 1003): -45,3.926 -44.758,4.168 7.765,4.168 7.765,-39.304 4.29,-42.779 2.351,-44.718 -34.172,-44.718 -44.111,-44.718 -46.212,-42.617 -44.354,-40.759 -44.354,4.249

## Keep-outs
Keep-Out Layer:
  circle w0.127: c2.511,0.403 r1.3
  circle w0.127: c-37.489,-39.597 r1.3
  circle w0.127: c-37.489,0.403 r1.3
  circle w0.127: c2.511,-39.597 r1.3
  lines w0.127: -38.889,-40.997 -38.889,1.803 3.911,1.803 3.911,-40.997 -38.889,-40.997

## Other copper
Top Layer:
  rectangle net VBAT_OUT: -25.552,-19.075 -22.504,-16.637
  region net VBAT_OUT: -35.331,-8.204 -33.63,-8.204 -33.63,-5.029 -35.331,-5.029
Bottom Layer:
  rectangle net AGND: -31.648,-30.683 -26.446,-29.616
  region net VBAT: -26.123,-24.788 -24.732,-24.788 -24.086,-25.433 -23.591,-25.433 -23.573,-25.452 -23.573,-25.893 -23.595,-25.915 -23.6,-25.91 -23.984,-25.91 -24.078,-26.003 -25.977,-26.003 -26.123,-25.858
  region net VCC_3V: -23.819,-22.899 -22.093,-22.899 -22.093,-22.371 -22.026,-22.304 -18.777,-22.304 -18.733,-22.347 -18.733,-23.265 -18.943,-23.475 -21.193,-23.475 -21.252,-23.534 -23.819,-23.534
  region net NetL6_1: -35.197,-16.749 -35.195,-16.751 -35.195,-17.195 -35.16,-17.23 -34.96,-17.23 -34.96,-16.339 -35.396,-15.903 -36.389,-15.903 -36.789,-16.303 -38.082,-16.303 -38.17,-16.391 -38.17,-16.999 -38.081,-17.088 -36.813,-17.088 -36.469,-16.744 -35.235,-16.744 -35.235,-17.155 -35.194,-17.196
  region net VBAT_OUT: -35.124,-0.743 -33.567,0.813 -31.596,0.813 -31.284,0.501 -31.284,-7.646 -33.419,-9.781 -33.419,-10.38 -33.812,-10.772 -33.812,-16.88 -33.105,-16.956 -33.092,-17.654 -34.085,-17.72 -34.359,-17.525 -34.783,-17.528 -34.764,-16.352 -35.094,-15.892

## Silkscreen, mask and mechanical layers (free items; w line width, h text height)
Top Overlay:
  rectangle: -8.865,-3.937 0.076,0.991
  lines w0.127: -37.456,-13.784 -37.45,-13.784 ; -37.195,-7.657 -36.805,-7.266 ; -36.396,-7.675 -36.805,-7.266 ; -34.549,-10.34 -34.14,-9.931 ; -34.53,-9.541 -34.14,-9.931 ; -36.805,-7.266 -36.805,-9.931 -34.14,-9.931
  text "NBIOT Tracer" at -10.312,-6.477 h2.54
  text "Y" at -37.442,-7.747 h0.51
  text "X" at -34.343,-8.636 h0.51 r180
  text "V1.0" at -6.629,-8.687 h2.54
Bottom Overlay:
  text "SWCLK" at -19.888,-36.525 h1.27 r90
  text "SWD" at -17.323,-37.617 h1.27 r90
  text "3.3V" at -21.133,-38.125 h1.27 r90
  text "G" at -18.644,-39.726 h1.27 r90
Mechanical 1:
  circle w0.127: c2.511,-39.597 r1.2
  circle w0.127: c-37.489,0.403 r1.2
  circle w0.127: c2.511,0.403 r1.2
  circle w0.127: c-37.489,-39.597 r1.2
  lines w0.127: -38.989,-41.116 4.011,-41.097 4.011,1.903 ; -38.989,-41.097 -38.989,1.903 4.011,1.903 ; 3.806,1.698 4.011,1.903

## Text inside footprints (layer, text, board x,y; h text height)
BATT: Bottom Overlay "+" at -16.586,-36.113 h1.02